# Altium PCB STM32_shield.PcbDoc
Units mm, origin at the board's own origin, x right, y up, seen from the top; angles counter-clockwise.
Board outline 157 x 97 mm, 2 copper layers (Top Layer, Bottom Layer), stack 1.571 mm thick; 43 components, 103 nets, 390 pads, 0 vias.
Unrouted connection lines stored in the file: 257.
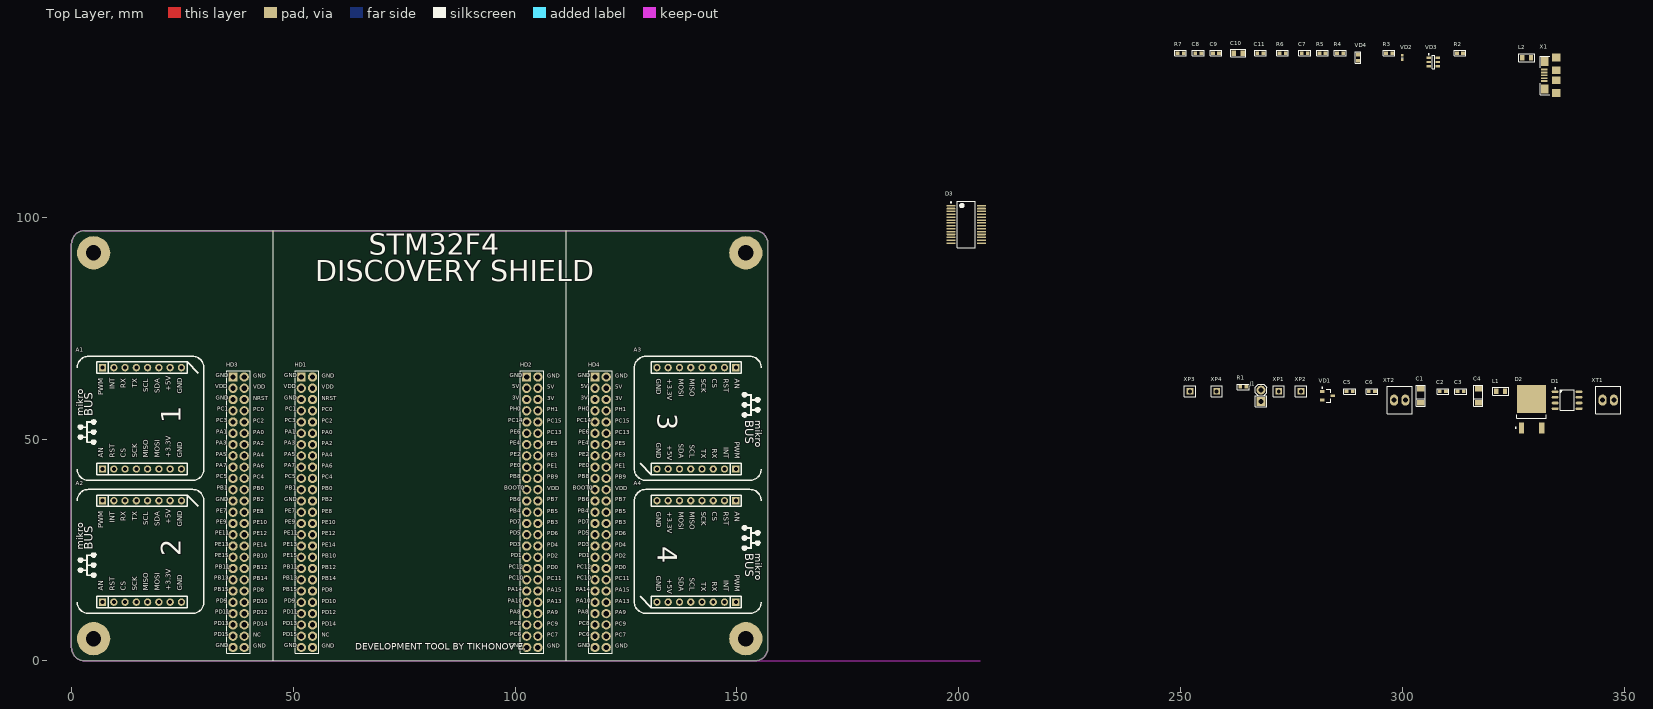
[diagram p0: Top Layer view]
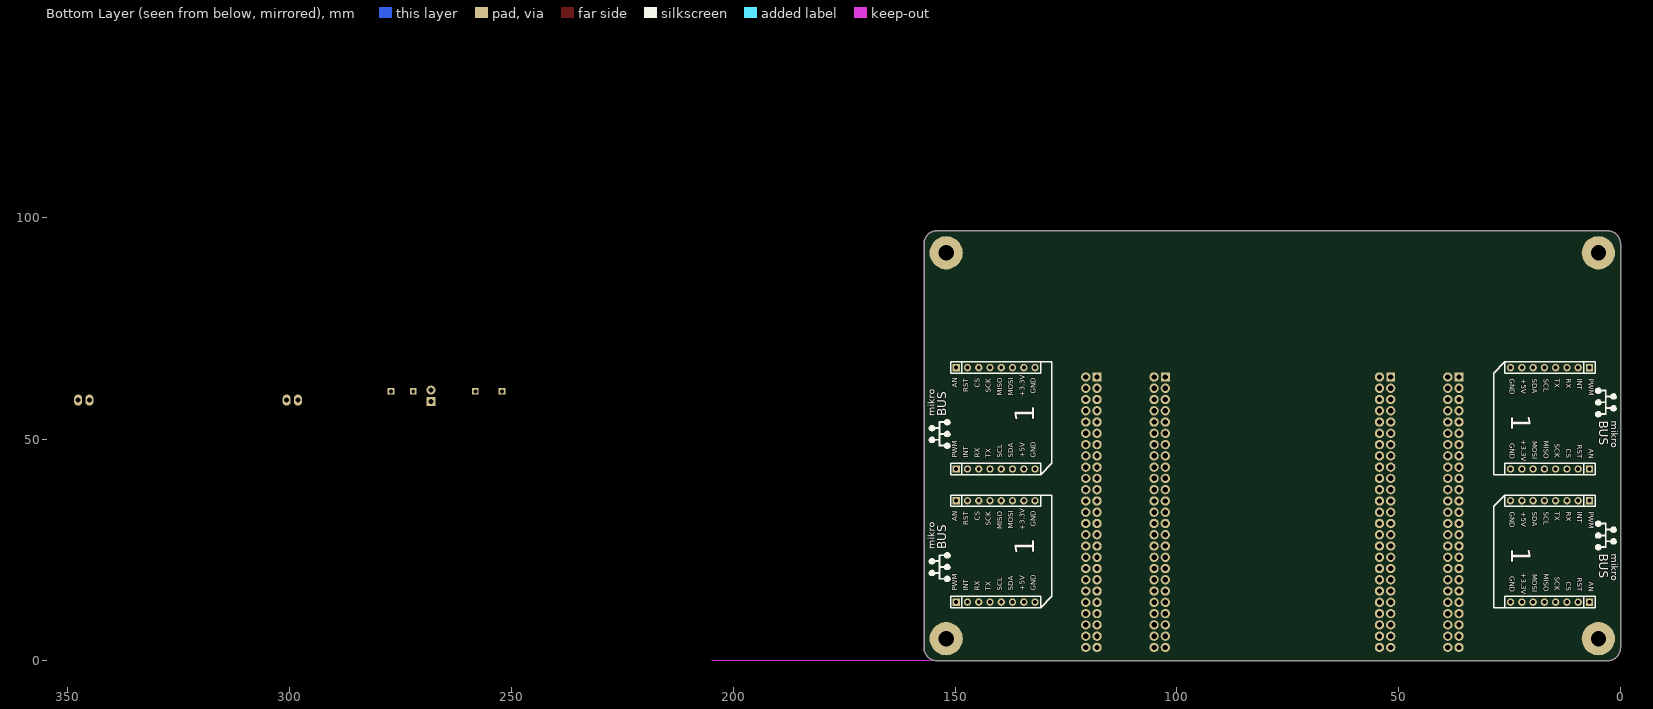
[diagram p1: Bottom Layer view, seen from below]

## Layer stack, top to bottom
Top Solder: solder mask 0.0102, Solder Resist, Dk 3.5
Top Layer: signal copper 0.0356
Dielectric 1: dielectric 1.5, FR-4, Dk 4.8
Bottom Layer: signal copper 0.0356
Bottom Solder: solder mask 0.0102, Solder Resist, Dk 3.5

## Board outline
0,3 0,94 cw(c3,94) 3,97 154,97 cw(c154,94) 157,94 157,3 cw(c154,3) 154,0 3,0 cw(c3,3)

## Design rules (kind name [scope] priority, off if disabled: settings)
Clearance Clearance_NPTH [All vs InPadClass('NPTH')] p1: gap=0.3 ignorepadtopadclearanceinfootprint=FALSE except(0: Arc-Hole Track-Hole SMDPad-Hole THPad-Hole Via-Hole Fill-Hole Poly-Hole Region-Hole Text-Hole)
Clearance Clearance_MultiLayerPad [OnLayer('Multi-Layer') and IsPad] p2: gap=0.25 ignorepadtopadclearanceinfootprint=FALSE except(0: Arc-Hole Track-Hole SMDPad-Hole THPad-Hole Via-Hole Fill-Hole Poly-Hole Region-Hole Text-Hole)
Clearance Clearance_Polygon [InPolygon] p3: gap=0.35 ignorepadtopadclearanceinfootprint=FALSE except(0: Arc-Hole Track-Hole SMDPad-Hole THPad-Hole Via-Hole Fill-Hole Poly-Hole Region-Hole Text-Hole)
Clearance [All] p4: gap=0.2 ignorepadtopadclearanceinfootprint=FALSE except(0: Arc-Hole Track-Hole SMDPad-Hole THPad-Hole Via-Hole Fill-Hole Poly-Hole Region-Hole Text-Hole)
DiffPairsRouting [All] p1: maxlimit=0.254 minlimit=0.15 mostfreqgap=0.254 toplayer_minwidth=0.15 toplayer_maxwidth=0.381 toplayer_prefwidth=0.381 bottomlayer_minwidth=0.15 bottomlayer_maxwidth=0.381 bottomlayer_prefwidth=0.381 maxuncoupledlength=12.7
Height [All] p1: minheight=0 maxheight=60 prefheight=12.7
HoleSize [All] p1: absolutevalues=TRUE maxlimit=5 minlimit=0.3 maxpercent=80.000 minpercent=20.000
HoleToHoleClearance [All] p1: gap=0.2 allowstackedmicrovias=TRUE
MinimumAnnularRing MinimumAnnularRing_1 [All] p1: minimumring=0.2
MinimumSolderMaskSliver [All] p1: minsoldermaskwidth=0.15
PlaneClearance [All] p1: clearance=0.5
PlaneConnect [All] p1: planeconnectstyle=Relief reliefexpansion=0.5 reliefentries=4 reliefconductorwidth=0.3 reliefairgap=0.2
PolygonConnect PolygonConnect_PowerPAD [All vs InPadClass('PowerPAD')] p1: connectstyle=Direct reliefconductorwidth=1 reliefentries=4 polygonreliefangle="90 Angle" airgapwidth=0.3
PolygonConnect PolygonConnect_PadGND [InNet('GND') and IsPad] p2: connectstyle=Relief reliefconductorwidth=0.4 reliefentries=4 polygonreliefangle="90 Angle" airgapwidth=0.2
PolygonConnect PolygonConnect_PadGND2 [InNet('GND2') and IsPad] p3: connectstyle=Relief reliefconductorwidth=0.4 reliefentries=4 polygonreliefangle="90 Angle" airgapwidth=0.2
PolygonConnect PolygonConnect_Via [IsVia] p4: connectstyle=Direct reliefconductorwidth=0.254 reliefentries=4 polygonreliefangle="90 Angle" airgapwidth=0.254
PolygonConnect [All] p5: connectstyle=Relief reliefconductorwidth=0.6 reliefentries=4 polygonreliefangle="90 Angle" airgapwidth=0.3
RoomDefinition Лист2 [InComponentClass('Лист2')] p1: confinementstyle=ConfineIn formatcopy=TRUE lockcomponents=FALSE outline 175,73 338,73 338,141 175,141
RoomDefinition Лист1 [InComponentClass('Лист1')] p2: confinementstyle=ConfineIn formatcopy=TRUE lockcomponents=FALSE outline 177.14,-2.22 350.14,-2.22 350.14,65.78 177.14,65.78
RoutingVias [All] p1: holewidth=0.3 width=0.7 viastyle="Through Hole" minholewidth=0.3 minwidth=0.7 maxholewidth=0.5 maxwidth=1.2
SilkToSilkClearance [All] p1: silktosilkclearance=0
SilkToSolderMaskClearance [IsPad] p1: minsilkscreentomaskgap=0.05 clearancetoexposedcopper=TRUE
SolderMaskExpansion [All] p1: expansion=0.05
Width [All] p1: maxlimit=10 minlimit=0.2 preferedwidth=0.6
21 further rules are at their usual default settings.

## Classes and differential pairs
component class Лист2: A3 A4 C7 C8 C9 C10 C11 D3 HD2 HD4 L2 R2 R3 R4 R5 R6 R7 VD2 VD3 VD4 X1
component class Лист1: A1 A2 C1 C2 C3 C4 C5 C6 D1 D2 HD1 HD3 J1 L1 R1 VD1 XP1 XP2 XP3 XP4 XT1 XT2
differential pair FTDI-D: +FTDI-D_P -FTDI-D_N
differential pair CAN: +CAN_P -CAN_N

## Components (designator, comment, footprint, x,y, rotation, side; value= is the part's Value field where it differs from the comment)
A1 "MIKROBUS HOST CONN._1" "MIKROBUS HOST CONN." 7,43.25 r90 top locked
A2 "MIKROBUS HOST CONN._1" "MIKROBUS HOST CONN." 7,13.25 r90 top locked
A3 "MIKROBUS HOST CONN._1" "MIKROBUS HOST CONN." 149.75,66.11 r270 top locked
A4 "MIKROBUS HOST CONN._1" "MIKROBUS HOST CONN." 149.75,36.11 r270 top locked
C1 "Tantalum capacitor, 10μF, 16V, ±10%, 1.2Ohm, case B (3528), -55...+125°C" "CAP: TANTAL-A" 304.14,59.78 r90 top value=10?F
C2 "Ceramic capacitor, 0.1uF, X7R, ±10%, 50V, 0603, -55...+125°C" "CAP: 0603" 309.14,60.78 r0 top value=0.1uF
C3 "Ceramic capacitor, 0.1uF, X7R, ±10%, 50V, 0603, -55...+125°C" "CAP: 0603" 313.14,60.78 r0 top value=0.1uF
C4 "Tantalum capacitor, 10μF, 16V, ±10%, 1.2Ohm, case B (3528), -55...+125°C" "CAP: TANTAL-A" 317.14,59.78 r90 top value=10?F
C5 "Ceramic capacitor, 0.1uF, X7R, ±10%, 50V, 0603, -55...+125°C" "CAP: 0603" 288.14,60.78 r0 top value=0.1uF
C6 "Ceramic capacitor, 0.1uF, X7R, ±10%, 50V, 0603, -55...+125°C" "CAP: 0603" 293.14,60.78 r0 top value=0.1uF
C7 "Ceramic capacitor, 0.1uF, X7R, ±10%, 50V, 0603, -55...+125°C" "CAP: 0603" 278,137 r0 top value=0.1uF
C8 "Ceramic capacitor, 0.1uF, X7R, ±10%, 50V, 0603, -55...+125°C" "CAP: 0603" 254,137 r0 top value=0.1uF
C9 "Ceramic capacitor, 0.1uF, X7R, ±10%, 50V, 0603, -55...+125°C" "CAP: 0603" 258,137 r0 top value=0.1uF
C10 "Ceramic capacitor, 10uF, X5R, ±10%, 10V, 0805, -55...+125°C" "CAP: 0805" 263,137 r0 top value=10uF
C11 "Ceramic capacitor, 0.1uF, X7R, ±10%, 50V, 0603, -55...+125°C" "CAP: 0603" 268,137 r0 top value=0.1uF
D1 "IC CAN transceiver, 5Mbps, TypeDuplex, 5V, -40...+85°C, SO8" 8-SOIC 337.14,58.78 r0 top
D2 "Linear voltage regulator, input 4.3...8.8V, 0.4V, output 3.3V, 0.8A, -40...+85°C, DPAK(TO-252)" DPAK(LDO) 329.14,55.78 r90 top
D3 "FT232RL" SSOP-28_N 201.7,98.4 r0 top
HD1 "PBD-50" "CON: PBD-50" 51.8,64 r0 top locked
HD2 "PBD-50" "CON: PBD-50" 102.6,64 r0 top locked
HD3 "PBD-50-1" "CON: PBD-50_NOT3D" 36.4,64 r0 top locked
HD4 "PBD-50-1" "CON: PBD-50_NOT3D" 118,64 r0 top locked
J1 "PLS-2" "CON: PLS-2" 268.14,59.78 r90 top
L1 "BLM21PG331SN1D" "IND: 0805" 322.14,60.78 r0 top value=330Ohm@100Mhz
L2 "BLM21PG331SN1D" "IND: 0805" 328,136 r0 top value=330Ohm@100Mhz
R1 "Resistor film, 100R, ±1%, 0603, 0.1W, -55...+125°C" "RES: 0603" 264.14,61.78 r0 top value=100R
R2 "Resistor film, 0R, ±1%, 0603, 0.1W, -55...+125°C" "RES: 0603" 313,137 r0 top value=0R
R3 "Resistor film, 330, ±1%, 0603, 0.1W, -55...+125°C" "RES: 0603" 297,137 r0 top value=330
R4 "Resistor film, 330, ±1%, 0603, 0.1W, -55...+125°C" "RES: 0603" 286,137 r0 top value=330
R5 "Resistor film, 10k, ±1%, 0603, 0.1W, -55...+125°C" "RES: 0603" 282,137 r0 top value=10k
R6 "Resistor film, 10k, ±1%, 0603, 0.1W, -55...+125°C" "RES: 0603" 273,137 r0 top value=10k
R7 "Resistor film, 10k, ±1%, 0603, 0.1W, -55...+125°C" "RES: 0603" 250,137 r0 top value=10k
VD1 "ESD Suppressors, Voltage, Current, VoltageDrop, RecoveryTime, SOT-23-3, -65...+150°C" SOT23 283.14,59.78 r0 top
VD2 "LED, *, *, *, -55...+150°C" "LED: 0402B" 300,136 r90 top
VD3 "USB ESD protection, 5V, Current, VoltageDrop, RecoveryTime, SOT23-6L, -55...+150°C" SOT23-6 307,135 r0 top
VD4 "LED, *, *, 0603, -55...+150°C" "LED: 0603R" 290,136 r90 top
X1 "USB micro B" "CON: USB micro-A (ZX62-B-5PA)" 332,132 r90 top
XP1 "\"GND\"" "CON: PLS-1" 272.14,60.78 r0 top
XP2 "\"GND\"" "CON: PLS-1" 277.14,60.78 r0 top
XP3 "\"GND\"" "CON: PLS-1" 252.14,60.78 r0 top
XP4 "\"GND\"" "CON: PLS-1" 258.14,60.78 r0 top
XT1 "Клеммник винтовой, 2pin, 2.54m, 250В, 8A" "CON: MPT 0,5/ 2-2,54 (Phoenix)" 345.14,58.78 r0 top
XT2 "Клеммник винтовой, 2pin, 2.54m, 250В, 8A" "CON: MPT 0,5/ 2-2,54 (Phoenix)" 298.14,58.78 r0 top

## Footprints (in the part's own frame and the unit in brackets; to place one, negate y for a bottom-side part, rotate by r counter-clockwise, add the part's x,y. Pads: shape width x height; smd on the part's side, far side on the other; paste and mask are expansions set on the pad)
8-SOIC [mm] "pitch 1.27 mm"
  rrect100% 1.55x0.6 smd: 1(-2.7,1.905) 2(-2.7,0.635) 3(-2.7,-0.635) 4(-2.7,-1.905) 5(2.7,-1.905) 6(2.7,-0.635) 7(2.7,0.635) 8(2.7,1.905)
  round 0.7 on Mech1: 28(-2.395,1.8)
  silkscreen extent -2.82,-2.3 1.61,2.82, body extent -3,-2.45 3,2.45, height 1.75
"CAP: 0603" [mm]
  rect 0.85x0.85 smd: 1(-0.7,0) 2(0.7,0)
  silkscreen extent -1.33,-0.63 1.33,0.63, body extent -0.8,-0.4 0.8,0.4, height 0.3
"CAP: 0805" [mm]
  rect 1x1.25 smd: 1(-1,0) 2(1,0)
  silkscreen extent -1.7,-0.82 1.7,0.82, body extent -1,-0.62 1,0.63, height 0.78
"CAP: TANTAL-A" [mm]
  rect 1.2x1.6 smd: 1(-1.6,0) 2(1.6,0)
  silkscreen extent -2.4,-1 2.4,1, body extent -1.7,-0.84 1.7,0.84, height 1.71
"CON: MPT 0,5/ 2-2,54 (Phoenix)" [mm] "1725656; 2.54; 2pin"
  oval 1.8x2.5 hole 1.1: 1(0,0) 2(2.54,0)
  round 0.5 on Bottom Overlay: ""(-2.2,0)
  round 0.5 on Mech1: ""(-2.2,0.018)
  silkscreen extent -1.5,-3.1 4.04,3.1, body extent -1.47,-3.13 4.07,3.07, height 8.5
"CON: PBD-50" [mm]
  rect 2x2 hole 1.2: 1(0,0)
  round 2.1 hole 1.2: 2(2.54,0) 3(0,-2.54) 4(2.54,-2.54) 5(0,-5.08) 6(2.54,-5.08) 7(0,-7.62) 8(2.54,-7.62) 9(0,-10.16) 10(2.54,-10.16) 11(0,-12.7) 12(2.54,-12.7) 13(0,-15.24) 14(2.54,-15.24) 15(0,-17.78) 16(2.54,-17.78) 17(0,-20.32) 18(2.54,-20.32) 19(0,-22.86) 20(2.54,-22.86) 21(0,-25.4) 22(2.54,-25.4) 23(0,-27.94) 24(2.54,-27.94) 25(0,-30.48) 26(2.54,-30.48) 27(0,-33.02) 28(2.54,-33.02) 29(0,-35.56) 30(2.54,-35.56) 31(0,-38.1) 32(2.54,-38.1) 33(0,-40.64) 34(2.54,-40.64) 35(0,-43.18) 36(2.54,-43.18) 37(0,-45.72) 38(2.54,-45.72) 39(0,-48.26) 40(2.54,-48.26) 41(0,-50.8) 42(2.54,-50.8) 43(0,-53.34) 44(2.54,-53.34) 45(0,-55.88) 46(2.54,-55.88) 47(0,-58.42) 48(2.54,-58.42) 49(0,-60.96) 50(2.54,-60.96)
  silkscreen extent -1.4,-62.3 3.9,1.4, body extent -1.27,-49.53 3.81,1.27, height 8.4
"CON: PBD-50_NOT3D" [mm] "посадочное место без 3D"
  rect 2x2 hole 1.2: 1(0,0)
  round 2.1 hole 1.2: 2(2.54,0) 3(0,-2.54) 4(2.54,-2.54) 5(0,-5.08) 6(2.54,-5.08) 7(0,-7.62) 8(2.54,-7.62) 9(0,-10.16) 10(2.54,-10.16) 11(0,-12.7) 12(2.54,-12.7) 13(0,-15.24) 14(2.54,-15.24) 15(0,-17.78) 16(2.54,-17.78) 17(0,-20.32) 18(2.54,-20.32) 19(0,-22.86) 20(2.54,-22.86) 21(0,-25.4) 22(2.54,-25.4) 23(0,-27.94) 24(2.54,-27.94) 25(0,-30.48) 26(2.54,-30.48) 27(0,-33.02) 28(2.54,-33.02) 29(0,-35.56) 30(2.54,-35.56) 31(0,-38.1) 32(2.54,-38.1) 33(0,-40.64) 34(2.54,-40.64) 35(0,-43.18) 36(2.54,-43.18) 37(0,-45.72) 38(2.54,-45.72) 39(0,-48.26) 40(2.54,-48.26) 41(0,-50.8) 42(2.54,-50.8) 43(0,-53.34) 44(2.54,-53.34) 45(0,-55.88) 46(2.54,-55.88) 47(0,-58.42) 48(2.54,-58.42) 49(0,-60.96) 50(2.54,-60.96)
  silkscreen extent -1.4,-62.3 3.9,1.4
"CON: PLS-1" [mm] "Connector; Header; 1 Position"
  rect 1.5x1.5 hole 0.9: 1(0,0)
  silkscreen extent -1.27,-1.27 1.27,1.27, body extent -1.27,-1.27 1.27,1.27, height 8.44
"CON: PLS-2" [mm]
  rect 2x2 hole 1.1: 1(-1.27,0)
  round 2 hole 1.1: 2(1.27,0)
  silkscreen extent -2.54,-1.27 2.54,1.27, body extent -2.57,-1.28 2.51,1.26, height 8.54
"CON: USB micro-A (ZX62-B-5PA)" [mm]
  rect 1.8x1.9 smd: 0(-4,-2.65) 0(4,-2.65)
  rect 2.1x1.6 smd: 0(-3.1,-0.1) 0(3.1,-0.1)
  rect 1.75x1.9 smd: 0(-1.125,-2.65) 0(1.125,-2.65)
  rect 0.4x1.4 smd: 1(-1.3,0) 2(-0.65,0) 3(0,0) 4(0.65,0) 5(1.3,0)
  round 0.5 on Top Overlay: ""(-4.85,0.75)
  silkscreen extent -4.35,-1.25 4.35,0.9, body extent -3.9,-4.8 3.9,0.2, height 2.68
DPAK(LDO) [mm] "DPAK for LDO"
  rect 2.5x1.2 smd: 1(-3.25,2.29) 3(-3.25,-2.29)
  rect 6.25x6.5 smd: TAB(3.25,0)
  round 0.5 on Mech1: ""(-3.2,2.9)
  silkscreen extent -3.37,-3.3 -0.3,3.71, body extent -3.8,-3.32 6.3,3.42, height 2.37
"IND: 0805" [mm]
  rect 1x1.25 smd: 1(-1,0) 2(1,0)
  silkscreen extent -1.8,-0.9 1.8,0.9, body extent -1,-0.62 1,0.63, height 0.85
"LED: 0402B" [mm]
  rect 0.6x0.6 smd: 1(-0.5,0) 2(0.5,0)
  silkscreen extent 0,-0.2 0,0.2, body extent -0.5,-0.25 0.51,0.25, height 0.45
"LED: 0603R" [mm]
  rect 0.85x0.85 smd: 1(-0.7,0) 2(0.7,0)
  silkscreen extent -1.33,-0.63 1.33,0.63, body extent -0.8,-0.4 0.8,0.4, height 0.6
"MIKROBUS HOST CONN." [mil]
  rect 65x65 hole 35: 1(0,0) 16(900,0)
  round 65 hole 35: 2(0,-100) 3(0,-200) 4(0,-300) 5(0,-400) 6(0,-500) 7(0,-600) 8(0,-700) 9(900,-700) 10(900,-600) 11(900,-500) 12(900,-400) 13(900,-300) 14(900,-200) 15(900,-100)
  silkscreen extent -100,-900 1000,225, body extent -49,-755 949,55, height 335
"RES: 0603" [mm]
  rect 0.85x0.85 smd: 1(-0.7,0) 2(0.7,0)
  silkscreen extent -1.33,-0.63 1.33,0.63, body extent -0.8,-0.4 0.8,0.4, height 0.44
SOT23 [mm]
  rect 1x0.6 smd: 1(-1.2,0.95) 2(-1.2,-0.95) 3(1.2,0)
  round 0.5 on Mech1: ""(-0.9,1.1)
  silkscreen extent -1.32,-1.5 0.7,1.92, body extent -1.32,-1.52 1.32,1.52, height 1.12
SOT23-6 [mm] "pitch 0.95 mm"
  rect 1x0.55 smd: 1(-1.025,0.95) 2(-1.025,0) 3(-1.025,-0.95) 4(1.025,-0.95) 5(1.025,0) 6(1.025,0.95)
  round 0.5 on Mech1: ""(-0.8,1)
  silkscreen extent -1.15,-1.5 0.25,1.9, body extent -1.4,-1.45 1.4,1.45, height 1.45
SSOP-28_N [mm] "SOP, 28-Leads, Body 10.2x5.3mm, Pitch 0.65mm, IPC Medium Density"
  oval 2.1x0.35 smd: 1(-3.45,4.225) 2(-3.45,3.575) 3(-3.45,2.925) 4(-3.45,2.275) 5(-3.45,1.625) 6(-3.45,0.975) 7(-3.45,0.325) 8(-3.45,-0.325) 9(-3.45,-0.975) 10(-3.45,-1.625) 11(-3.45,-2.275) 12(-3.45,-2.925) 13(-3.45,-3.575) 14(-3.45,-4.225) 15(3.45,-4.225) 16(3.45,-3.575) 17(3.45,-2.925) 18(3.45,-2.275) 19(3.45,-1.625) 20(3.45,-0.975) 21(3.45,-0.325) 22(3.45,0.325) 23(3.45,0.975) 24(3.45,1.625) 25(3.45,2.275) 26(3.45,2.925) 27(3.45,3.575) 28(3.45,4.225)
  silkscreen extent -3.57,-5.25 2,5.25, body extent -2.8,-5.25 2.8,5.25, height 2

## Part data
A1 A2 A3 A4: "mikroBUS Host Socket", Manufacturer=Connfly, PartNumber="PBS-8 (2pcs)", HelpURL=https://www.electronshik.ru/item/CONNFLY/PBS-8, SMD=No
  A1: Number=1
  A2: Number=2
  A3: Number=3
  A4: Number=4
C1 C4: library part Tantal_B, Manufacturer=AVX, Package="case B (3528)", PartNumber=TAJB106K016RNJ, Temperature=-55...+125°C, Tolerance=±10%, TypeCapacitor="Tantalum capacitor", TypeDielectric=X7R, ValueManufacturerPartNumber="Tantalum capacitor, 10?F, 16V, ±10%, 1.2Ohm, case B (3528), -55...+125°C", Voltage=16V, HelpURL=https://www.electronshik.ru/item/AVX/TAJB106K016RNJ, Impedance=1.2Ohm
C2 C3 C5 C6 C7 C8 C9 C11: library part Ceramic_0603, Manufacturer=SAMSUNG, Package=0603, PartNumber=CL10B104KB8NNNC, Temperature=-55...+125°C, Tolerance=±10%, TypeCapacitor="Ceramic capacitor", TypeDielectric=X7R, Voltage=50V, HelpURL=https://www.electronshik.ru/item/SAMSUNG/CL10B104KB8NNNC, ValueManufacturerPartNumber="Ceramic capacitor, 0.1uF, X7R, ±10%, 50V, 0603, -55...+125°C"
C10: library part Ceramic_0805, Manufacturer=SAMSUNG, Package=0805, PartNumber=CL21A106KPFNNNE, Temperature=-55...+125°C, Tolerance=±10%, TypeCapacitor="Ceramic capacitor", TypeDielectric=X5R, Voltage=10V, HelpURL=https://www.electronshik.ru/item/SAMSUNG/CL21A106KPFNNNE, ValueManufacturerPartNumber="Ceramic capacitor, 10uF, X5R, ±10%, 10V, 0805, -55...+125°C"
D1: library part TJA1042T/3, "CAN", Manufacturer=NXP, Package=SO8, Temperature=-40...+85°C, ComponentType="IC CAN transceiver", DataRate=5Mbps, HelpURL=https://www.electronshik.ru/item/NXP/TJA1042T%3A%3A3.118, PartNumber=TJA1042T/3, Supply=5V, ValueManufacturerPartNumber="IC CAN transceiver, 5Mbps, TypeDuplex, 5V, -40...+85°C, SO8"
D2: library part LD29080DT33R, "Linear voltage regulator", CurrentOutput=0.8A, Manufacturer=STMicroelectronics, Package=DPAK(TO-252), PartNumber=LD29080DT33, Temperature=-40...+85°C, VoltageInput="input 4.3...8.8V", VoltageOutput="output 3.3V", ComponentType="Linear voltage regulator", HelpURL=https://www.electronshik.ru/item/ST/LD29080DT33R, MaxDropout=0.4V, ValueManufacturerPartNumber="Linear voltage regulator, input 4.3...8.8V, 0.4V, output 3.3V, 0.8A, -40...+85°C, DPAK(TO-252)"
D3: "USB UART Asynchronous Serial Data Transfer Chip, SSOP-28, Tape and Reel", Manufacturer=FTDI, Package=SSOP-28, ComponentType=UART-USB, HelpURL=https://www.electronshik.ru/item/FTDI/FT232RL, PartNumber=FT232RL, Supply=5V
HD1 HD2: "Розетка в 2 ряда", Manufacturer="Connfly Electronic", HelpURL=https://www.electronshik.ru/item/CONNFLY/PBD-50, Part_Number="PBD-50 (DS1023-2x25)", Pattern/Footprint=PBD-50, Published=2019, Publisher=TEN, Type=Розетка
HD3 HD4: "Пустое место", Manufacturer="Connfly Electronic", HelpURL=https://www.electronshik.ru/item/CONNFLY/PBD-50, Part_Number=PBD-50, Published=2019, Publisher=TEN, Type=Розетка
J1: library part Jumper_single, CommentText="\"120\"", PartNumber=PLS-2
L1 L2: library part EMI_SMD, Manufacturer="Murata Electronics", MaxCurrent=1500mA, Package=0805, Temperature=-55...+125°C, TypeInductor="Fixed inductor", ValueManufacturerPartNumber="Fixed inductor, 330Ohm@100Mhz, Tolerance, 0805, 1500mA, -55...+125°C", HelpURL=https://www.electronshik.ru/item/MUR/BLM21PG331SN1D, PartNumber=BLM21PG331SN1D
R1: library part Resistor_0603, Manufacturer=Yageo, Package=0603, PartNumber=RC0603FR-07100RL, Power=0.1W, Temperature=-55...+125°C, Tolerance=±1%, TypeResistor="Resistor film", HelpURL=https://www.electronshik.ru/item/YAG/RC0603FR-07100RL, ValueManufacturerPartNumber="Resistor film, 100R, ±1%, 0603, 0.1W, -55...+125°C"
R2: library part Resistor_0603, Manufacturer=Yageo, Package=0603, PartNumber=RC0603JR-070RL, Power=0.1W, Temperature=-55...+125°C, Tolerance=±1%, TypeResistor="Resistor film", HelpURL=https://www.electronshik.ru/item/YAG/RC0603JR-070RL, ValueManufacturerPartNumber="Resistor film, 0R, ±1%, 0603, 0.1W, -55...+125°C"
R3 R4: library part Resistor_0603, Manufacturer=Yageo, Package=0603, PartNumber=RC0603JR-07330RL, Power=0.1W, Temperature=-55...+125°C, Tolerance=±1%, TypeResistor="Resistor film", HelpURL=https://www.electronshik.ru/item/YAG/RC0603JR-074K7L, ValueManufacturerPartNumber="Resistor film, 330, ±1%, 0603, 0.1W, -55...+125°C"
R5 R6 R7: library part Resistor_0603, Manufacturer=Yageo, Package=0603, PartNumber=RC0603JR-0710KL, Power=0.1W, Temperature=-55...+125°C, Tolerance=±1%, TypeResistor="Resistor film", HelpURL=https://www.electronshik.ru/item/YAG/RC0603JR-0710KL, ValueManufacturerPartNumber="Resistor film, 10k, ±1%, 0603, 0.1W, -55...+125°C"
VD1: library part PESD2CAN, Breakdown Voltage=28V, Manufacturer=NEXPERIA, Package=SOT-23-3, PartNumber=PESD2CAN.215, Temperature=-65...+150°C, HelpURL=https://www.electronshik.ru/item/NEX-NXP/PESD2CAN.215, TypeDiode="ESD Suppressors", ValueManufacturerPartNumber="ESD Suppressors, Voltage, Current, VoltageDrop, RecoveryTime, SOT-23-3, -65...+150°C"
VD2: library part LED_single, Color=GREEN, Manufacturer=Foryard, PartNumber=FYLS-0603UGC, Temperature=-55...+150°C, HelpURL=https://www.electronshik.ru/item/FORYARD/FYLS-0603UGC, TypeDiode=LED, ValueManufacturerPartNumber="LED, *, *, *, -55...+150°C"
VD3: library part USBLC6-4SC6, Manufacturer="ST Microelectronics", Package=SOT23-6L, Temperature=-55...+150°C, Voltage=5V, HelpURL=https://www.electronshik.ru/item/ST/USBLC6-2SC6, PartNumber=USBLC6-4SC6, TypeDiode="USB ESD protection", ValueManufacturerPartNumber="USB ESD protection, 5V, Current, VoltageDrop, RecoveryTime, SOT23-6L, -55...+150°C"
VD4: library part LED_single, Color=RED, Manufacturer=Foryard, Package=0603, PartNumber="FYLS-0603URC / Foryard", Temperature=-55...+150°C, HelpURL=https://www.electronshik.ru/item/FORYARD/FYLS-0603URC, TypeDiode=LED, ValueManufacturerPartNumber="LED, *, *, 0603, -55...+150°C"
X1: library part Connector_USB_micro_B, Manufacturer="Hirose Electric", PartNumber=ZX62-B-5PA, CommentText="\"USB\"", HelpURL=https://www.electronshik.ru/item/HI/ZX62-B-5PA%5B33%5D, TypeConnector="USB micro B", ValueManufacturerPartNumber="USB micro B"
XP1 XP2 XP3 XP4: library part PLS-1, "Вилка", Manufacturer="Ningbo connfly electronic (Zhenqin)", HelpURL="\\Datasrv\дивизион эп\works\Департамент разработки\оСиСР\КОМПЛЕКТАЦИЯ\разъемы\pls.pdf", Part_Number=PLS-1, Published=26.12.2017, Publisher=TEN, Type="Control pin"
XT1 XT2: library part Connector_terminal_2pin, CurrentMax=8A, Manufacturer=Китай, PartNumber=308-021-14, VoltageMax=250В, CommentText="\"Разъем\"", HelpURL=https://www.chipdip.ru/product/dg350-3.5-02p-12, HelpURL2=https://www.electronshik.ru/item/DEGSON/DG308-2.54-02P-14-00A%5BH%5D, Multichannel=2pin, Pitch=2.54m, TypeConnector="Клеммник винтовой", ValueManufacturerPartNumber="Клеммник винтовой, 2pin, 2.54m, 250В, 8A"

## Free pads (board coordinates)
  round 7.5 hole 3.4: ""(5,5) ""(5,92) ""(152,5) ""(152,92)

## Nets (pads, with @x,y where several pads share a name; then routed paths per layer and width w, separated by ;. In a path a pad name is that pad's centre, name@x,y a point inside that pad or via, vN(x,y) a via of type N, cw(c..) or ccw(c..) an arc to the next point about the centre after c; other vN are vias at no path point)
3V: C11.2 D3.4 HD2.5 HD2.6 HD3.3 HD3.4 HD4.3 HD4.4 HD4.5 HD4.6
5V: A1.10 A2.10 A3.10 A4.10 C5.2 C9.2 C10.2 D1.3 D3.20 HD2.3 HD2.4 L1.2
BOOT0: HD2.21 HD4.21
CAN_N: D1.6 J1.1 VD1.2 XT2.1
CAN_P: D1.7 R1.2 VD1.1 XT1.2
FTDI-D_N: D3.16 VD3.1 X1.2
FTDI-D_P: D3.15 VD3.6 X1.3
GND: A1.8 A1.9 A2.8 A2.9 A3.8 A3.9 A4.8 A4.9 C1.1 C2.1 C3.1 C4.1 C5.1 C6.1 C7.1 C8.1 C9.1 C10.1 C11.1 D1.2 D1.8 D2.TAB D3.7 D3.18 D3.21 D3.25 D3.26 HD1.1 HD1.2 HD1.5 HD1.23 HD1.49 HD1.50 HD2.1 HD2.2 HD2.49 HD2.50 HD3.1 HD3.2 HD3.5 HD3.23 HD3.49 HD3.50 HD4.1 HD4.2 HD4.49 HD4.50 R2.1 R7.1 VD1.3 VD3.2 X1.0 X1.5 XP1.1 XP2.1 XP3.1 XP4.1 XT2.2
NetA1_11: A1.11 A2.11 HD2.24 HD4.24
NetA1_12: A1.12 A2.12 HD2.19 HD4.19
NetA3_1: A3.1 HD1.19 HD3.19
NetA3_16: A3.16 HD1.21 HD3.21
NetA4_1: A4.1 HD1.22 HD3.22
NetC1_2: C1.2 C2.2 D2.1 L1.1
NetC8_2: C8.2 D3.17
NetD1_1: D1.1 HD2.33 HD4.33
NetD1_4: D1.4 HD2.36 HD4.36
NetD3_1: D3.1 HD1.13 HD3.13
NetD3_5: D3.5 HD1.14 HD3.14
NetD3_19: D3.19 R5.1 R6.2
NetJ1_2: J1.2 R1.1
NetL2_1: L2.1 X1.1
NetR2_2: R2.2 X1.4
NetR3_1: R3.1 VD2.1
NetR4_1: R4.1 VD4.1
NetR6_1: R6.1 R7.2
NRST: HD1.6 HD3.6
PA0: HD1.12 HD3.12
PA1/TIM-2/5: A1.16 HD1.11 HD3.11
PA4: HD1.16 HD3.16
PA5: HD1.15 HD3.15
PA6: HD1.18 HD3.18
PA7: HD1.17 HD3.17
PA8/I2C3-SCL: A3.12 A4.12 HD2.43 HD4.43
PA9: HD2.44 HD4.44
PA10: HD2.41 HD4.41
PA13: HD2.42 HD4.42
PA14: HD2.39 HD4.39
PA15: HD2.40 HD4.40
PB2: HD1.24 HD3.24
PB3/SPI13-SCK: A3.4 A4.4 HD2.28 HD4.28
PB4/SPI13-MISO: A3.5 A4.5 HD2.25 HD4.25
PB5/SPI13-MOSI: A3.6 A4.6 HD2.26 HD4.26
PB6: HD2.23 HD4.23
PB9: HD2.20 HD4.20
PB10/UART3-TX: A1.13 A2.13 HD1.34 HD3.34
PB11/UART3-RX: A1.14 A2.14 HD1.35 HD3.35
PB12/CS: A1.3 HD1.36 HD3.36
PB13/SPI2-SCK: A1.4 A2.4 HD1.37 HD3.37
PB14/SPI2-MISO: A1.5 A2.5 HD1.38 HD3.38
PB15/SPI2-MOSI: A1.6 A2.6 HD1.39 HD3.39
PC0: HD1.8 HD3.8
PC1/ADC123-IN11: A1.1 HD1.7 HD3.7
PC2/ADC123-IN12: A2.1 HD1.10 HD3.10
PC3: HD1.9 HD3.9
PC4: HD1.20 HD3.20
PC6/UART6-TX: A3.13 A4.13 HD2.47 HD4.47
PC7/UART6-RX: A3.14 A4.14 HD2.48 HD4.48
PC8/TIM-3/8: A4.16 HD2.45 HD4.45
PC9/I2C3-SDA: A3.11 A4.11 HD2.46 HD4.46
PC10: HD2.37 HD4.37
PC11/INT: A4.15 HD2.38 HD4.38
PC12: HD2.35 HD4.35
PC13: HD2.12 HD4.12
PC14: HD2.9 HD4.9
PC15: HD2.10 HD4.10
PD2/INT: A3.15 HD2.34 HD4.34
PD3: HD2.31 HD4.31
PD4: HD2.32 HD4.32
PD5: HD2.29 HD4.29
PD6/RST: A4.2 HD2.30 HD4.30
PD7/CS: A4.3 HD2.27 HD4.27
PD8: HD1.40 HD3.40
PD9: HD1.41 HD3.41
PD10: HD1.42 HD3.42
PD11: HD1.43 HD3.43
PD12: HD1.44 HD3.44
PD13: HD1.45 HD3.45
PD14: HD1.46 HD3.46
PD15: HD1.47 HD3.47
PE0: HD2.17 HD4.17
PE1: HD2.18 HD4.18
PE2: HD2.15 HD4.15
PE3: HD2.16 HD4.16
PE4/RST: A3.2 HD2.13 HD4.13
PE5/CS: A3.3 HD2.14 HD4.14
PE6: HD2.11 HD4.11
PE7/INT: A1.15 HD1.25 HD3.25
PE8/INT: A2.15 HD1.26 HD3.26
PE9: HD1.27 HD3.27
PE10/RST: A1.2 HD1.28 HD3.28
PE11: HD1.29 HD3.29
PE12/RST: A2.2 HD1.30 HD3.30
PE13/TIM-1: A2.16 HD1.31 HD3.31
PE14/CS: A2.3 HD1.32 HD3.32
PE15: HD1.33 HD3.33
PH0: HD2.7 HD4.7
PH1: HD2.8 HD4.8
RX-LED: D3.23 VD2.2
TX-LED: D3.22 VD4.2
VBUS: C7.2 L2.2 R5.2 VD3.5
VCC3.3: A1.7 A2.7 A3.7 A4.7 C3.2 C4.2 C6.2 D1.5 D2.3 R3.2 R4.2 XT1.1
VDD: HD1.3 HD1.4 HD2.22 HD4.22
pads on no net: D1.28 D2. D3.2 D3.3 D3.6 D3.8 D3.9 D3.10 D3.11 D3.12 D3.13 D3.14 D3.24 D3.27 D3.28 HD1.48 HD3.48 VD1. VD3. VD3.3 VD3.4 X1. XT1. XT2.

## Keep-outs
Keep-Out Layer:
  lines w0.2: 53.8,0 204.8,0 ; 0,94 cw(c3,94) 3,97 154,97 ; 0,94 0,94 ; 0,94 0,3 ccw(c3,3) 3,0 ; 3,0 3,0 ; 3,0 154,0 ccw(c154,3) 157,3 ; 154,97 cw(c154,94) 157,94 157,3 ; 154,97 154,97 ; 157,3 157,3

## Silkscreen, mask and mechanical layers (free items; w line width, h text height)
Top Overlay:
  lines w0.2: 45.5,0 45.5,97 ; 111.5,0 111.5,97
  text "STM32F4" at 67,90 h8
  text "DISCOVERY SHIELD" at 55,84 h8
  text "GND" at 32.521,63.6 h1.5
  text "GND" at 47.921,63.6 h1.5
  text "GND" at 98.764,63.6 h1.5
  text "GND" at 114.164,63.6 h1.5
  text "GND" at 41,63.5 h1.5
  text "GND" at 56.4,63.5 h1.5
  text "GND" at 107.199,63.5 h1.5
  text "GND" at 122.599,63.5 h1.5
  text "VDD" at 32.442,61.1 h1.5
  text "VDD" at 47.842,61.1 h1.5
  text "5V" at 99.394,61.1 h1.5
  text "5V" at 114.794,61.1 h1.5
  text "VDD" at 41,61 h1.5
  text "VDD" at 56.4,61 h1.5
  text "5V" at 107.199,61 h1.5
  text "5V" at 122.599,61 h1.5
  text "GND" at 32.521,58.5 h1.5
  text "GND" at 47.921,58.5 h1.5
  text "3V" at 99.393,58.5 h1.5
  text "3V" at 114.793,58.5 h1.5
  text "NRST" at 41,58.4 h1.5
  text "NRST" at 56.4,58.4 h1.5
  text "3V" at 107.199,58.4 h1.5
  text "3V" at 122.599,58.4 h1.5
  text "PC1" at 32.836,56 h1.5
  text "PC1" at 48.236,56 h1.5
  text "PH0" at 98.843,56 h1.5
  text "PH0" at 114.243,56 h1.5
  text "PC0" at 41,55.9 h1.5
  text "PC0" at 56.4,55.9 h1.5
  text "PH1" at 107.199,55.9 h1.5
  text "PH1" at 122.599,55.9 h1.5
  text "PC3" at 32.679,53.5 h1.5
  text "PC3" at 48.079,53.5 h1.5
  text "PC14" at 98.451,53.5 h1.5
  text "PC14" at 113.851,53.5 h1.5
  text "PC2" at 41,53.4 h1.5
  text "PC2" at 56.4,53.4 h1.5
  text "PC15" at 107.199,53.4 h1.5
  text "PC15" at 122.599,53.4 h1.5
  text "PA1" at 32.678,50.9 h1.5
  text "PA1" at 48.078,50.9 h1.5
  text "PE6" at 98.922,50.9 h1.5
  text "PE6" at 114.322,50.9 h1.5
  text "PA0" at 41,50.8 h1.5
  text "PA0" at 56.4,50.8 h1.5
  text "PC13" at 107.199,50.8 h1.5
  text "PC13" at 122.599,50.8 h1.5
  text "PA3" at 32.521,48.4 h1.5
  text "PA3" at 47.921,48.4 h1.5
  text "PE4" at 98.844,48.4 h1.5
  text "PE4" at 114.244,48.4 h1.5
  text "PA2" at 41,48.3 h1.5
  text "PA2" at 56.4,48.3 h1.5
  text "PE5" at 107.199,48.3 h1.5
  text "PE5" at 122.599,48.3 h1.5
  text "PA5" at 32.521,45.8 h1.5
  text "PA5" at 47.921,45.8 h1.5
  text "PE2" at 98.922,45.8 h1.5
  text "PE2" at 114.322,45.8 h1.5
  text "PA4" at 41,45.7 h1.5
  text "PA4" at 56.4,45.7 h1.5
  text "PE3" at 107.199,45.7 h1.5
  text "PE3" at 122.599,45.7 h1.5
  text "PA7" at 32.521,43.3 h1.5
  text "PA7" at 47.921,43.3 h1.5
  text "PE0" at 98.922,43.3 h1.5
  text "PE0" at 114.322,43.3 h1.5
  text "PA6" at 41,43.2 h1.5
  text "PA6" at 56.4,43.2 h1.5
  text "PE1" at 107.199,43.2 h1.5
  text "PE1" at 122.599,43.2 h1.5
  text "PC5" at 32.679,40.8 h1.5
  text "PC5" at 48.079,40.8 h1.5
  text "PB8" at 98.843,40.8 h1.5
  text "PB8" at 114.243,40.8 h1.5
  text "PC4" at 41,40.7 h1.5
  text "PC4" at 56.4,40.7 h1.5
  text "PB9" at 107.199,40.7 h1.5
  text "PB9" at 122.599,40.7 h1.5
  text "PB1" at 32.757,38.2 h1.5
  text "PB1" at 48.157,38.2 h1.5
  text "BOOT0" at 97.582,38.2 h1.5
  text "BOOT0" at 112.982,38.2 h1.5
  text "PB0" at 41,38.1 h1.5
  text "PB0" at 56.4,38.1 h1.5
  text "VDD" at 107.2,38.1 h1.5
  text "VDD" at 122.6,38.1 h1.5
  text "GND" at 32.521,35.7 h1.5
  text "GND" at 47.921,35.7 h1.5
  text "PB6" at 98.843,35.7 h1.5
  text "PB6" at 114.243,35.7 h1.5
  text "PB2" at 41,35.6 h1.5
  text "PB2" at 56.4,35.6 h1.5
  text "PB7" at 107.199,35.6 h1.5
  text "PB7" at 122.599,35.6 h1.5
  text "PE7" at 32.679,33.1 h1.5
  text "PE7" at 48.079,33.1 h1.5
  text "PB4" at 98.765,33.1 h1.5
  text "PB4" at 114.165,33.1 h1.5
  text "PE8" at 41,33 h1.5
  text "PE8" at 56.4,33 h1.5
  text "PB5" at 107.199,33 h1.5
  text "PB5" at 122.599,33 h1.5
  text "PE9" at 32.679,30.6 h1.5
  text "PE9" at 48.079,30.6 h1.5
  text "PD7" at 98.843,30.6 h1.5
  text "PD7" at 114.243,30.6 h1.5
  text "PE10" at 41,30.5 h1.5
  text "PE10" at 56.4,30.5 h1.5
  text "PB3" at 107.199,30.5 h1.5
  text "PB3" at 122.599,30.5 h1.5
  text "PE11" at 32.442,28.1 h1.5
  text "PE11" at 47.842,28.1 h1.5
  text "PD5" at 98.843,28.1 h1.5
  text "PD5" at 114.243,28.1 h1.5
  text "PE12" at 41,28 h1.5
  text "PE12" at 56.4,28 h1.5
  text "PD6" at 107.199,28 h1.5
  text "PD6" at 122.599,28 h1.5
  text "PE13" at 32.285,25.5 h1.5
  text "PE13" at 47.685,25.5 h1.5
  text "PD3" at 98.843,25.5 h1.5
  text "PD3" at 114.243,25.5 h1.5
  text "PE14" at 41,25.4 h1.5
  text "PE14" at 56.4,25.4 h1.5
  text "PD4" at 107.199,25.4 h1.5
  text "PD4" at 122.599,25.4 h1.5
  text "PE15" at 32.285,23 h1.5
  text "PE15" at 47.685,23 h1.5
  text "PD1" at 98.999,23 h1.5
  text "PD1" at 114.399,23 h1.5
  text "PB10" at 41,22.9 h1.5
  text "PB10" at 56.4,22.9 h1.5
  text "PD2" at 107.199,22.9 h1.5
  text "PD2" at 122.599,22.9 h1.5
  text "PB11" at 32.363,20.4 h1.5
  text "PB11" at 47.763,20.4 h1.5
  text "PC12" at 98.528,20.4 h1.5
  text "PC12" at 113.928,20.4 h1.5
  text "PB12" at 41,20.3 h1.5
  text "PB12" at 56.4,20.3 h1.5
  text "PD0" at 107.199,20.3 h1.5
  text "PD0" at 122.599,20.3 h1.5
  text "PB13" at 32.206,17.9 h1.5
  text "PB13" at 47.606,17.9 h1.5
  text "PC10" at 98.528,17.9 h1.5
  text "PC10" at 113.928,17.9 h1.5
  text "PB14" at 41,17.8 h1.5
  text "PB14" at 56.4,17.8 h1.5
  text "PC11" at 107.199,17.8 h1.5
  text "PC11" at 122.599,17.8 h1.5
  text "PB15" at 32.206,15.4 h1.5
  text "PB15" at 47.606,15.4 h1.5
  text "PA14" at 98.293,15.4 h1.5
  text "PA14" at 113.693,15.4 h1.5
  text "PD8" at 41,15.3 h1.5
  text "PD8" at 56.4,15.3 h1.5
  text "PA15" at 107.199,15.3 h1.5
  text "PA15" at 122.599,15.3 h1.5
  text "PD9" at 32.6,12.8 h1.5
  text "PD9" at 48,12.8 h1.5
  text "PA10" at 98.37,12.8 h1.5
  text "PA10" at 113.77,12.8 h1.5
  text "PD10" at 41,12.7 h1.5
  text "PD10" at 56.4,12.7 h1.5
  text "PA13" at 107.199,12.7 h1.5
  text "PA13" at 122.599,12.7 h1.5
  text "PD11" at 32.363,10.3 h1.5
  text "PD11" at 47.763,10.3 h1.5
  text "PA8" at 98.764,10.3 h1.5
  text "PA8" at 114.164,10.3 h1.5
  text "PD12" at 41,10.2 h1.5
  text "PD12" at 56.4,10.2 h1.5
  text "PA9" at 107.199,10.2 h1.5
  text "PA9" at 122.599,10.2 h1.5
  text "PD13" at 32.206,7.7 h1.5
  text "PD13" at 47.606,7.7 h1.5
  text "PC8" at 98.922,7.7 h1.5
  text "PC8" at 114.322,7.7 h1.5
  text "PD14" at 41,7.6 h1.5
  text "PD14" at 56.4,7.6 h1.5
  text "PC9" at 107.199,7.6 h1.5
  text "PC9" at 122.599,7.6 h1.5
  text "PD15" at 32.206,5.2 h1.5
  text "PD15" at 47.606,5.2 h1.5
  text "PC6" at 98.922,5.2 h1.5
  text "PC6" at 114.322,5.2 h1.5
  text "NC" at 41,5.1 h1.5
  text "NC" at 56.4,5.1 h1.5
  text "PC7" at 107.199,5.1 h1.5
  text "PC7" at 122.599,5.1 h1.5
  text "GND" at 32.521,2.7 h1.5
  text "GND" at 47.921,2.7 h1.5
  text "GND" at 98.764,2.7 h1.5
  text "GND" at 114.164,2.7 h1.5
  text "GND" at 41,2.6 h1.5
  text "GND" at 56.4,2.6 h1.5
  text "GND" at 107.199,2.6 h1.5
  text "GND" at 122.599,2.6 h1.5
  text "DEVELOPMENT TOOL BY TIKHONOV E." at 64,2 h2.5
Top Assy:
  lines w0.2: 78.5,0 78.5,97
Border:
  lines w0.2: 53.8,0 204.8,0 ; 0,94 cw(c3,94) 3,97 154,97 cw(c154,94) 157,94 157,3 cw(c154,3) 154,0 3,0 cw(c3,3) 0,3 0,94 ; 0,94 0,94

## Dimensions
0,97 to 157,97 on Size
0,0 to 0,97 on Size

## Text inside footprints (layer, text, board x,y; h text height)
A1: Top Overlay "1" at 26.05,53.537 h7.62 r90; Top Overlay "BUS" at 5.514,55.112 h3.2 r90; Top Overlay "mikro" at 3.176,55.112 h2.7 r90; Top Overlay "PWM" at 7.635,59.932 h2 r90; Top Overlay "AN" at 7.635,45.79 h2 r90; Top Overlay "+5V" at 22.875,60.801 h2 r90; Top Overlay "GND" at 25.415,60.217 h2 r90; Top Overlay "TX" at 15.255,61.593 h2 r90; Top Overlay "RX" at 12.715,61.504 h2 r90; Top Overlay "INT" at 10.175,61.195 h2 r90; Top Overlay "SCL" at 17.795,60.61 h2 r90; Top Overlay "GND" at 25.415,45.79 h2 r90; Top Overlay "+3.3V" at 22.875,45.79 h2 r90; Top Overlay "MOSI" at 20.335,45.79 h2 r90; Top Overlay "SCK" at 15.255,45.79 h2 r90; Top Overlay "MISO" at 17.795,45.79 h2 r90; Top Overlay "CS" at 12.715,45.79 h2 r90; Top Overlay "RST" at 10.175,45.79 h2 r90; Top Overlay "SDA" at 20.335,60.377 h2 r90; Bottom Overlay "1" at 26.05,55.569 h7.62 r90; Bottom Overlay "RST" at 10.175,48.774 h2 r90; Bottom Overlay "CS" at 12.715,47.797 h2 r90; Bottom Overlay "MISO" at 17.795,49.629 h2 r90; Bottom Overlay "SCK" at 15.255,48.945 h2 r90; Bottom Overlay "MOSI" at 20.335,49.556 h2 r90; Bottom Overlay "+3.3V" at 22.875,49.854 h2 r90; Bottom Overlay "GND" at 25.415,49.092 h2 r90; Bottom Overlay "AN" at 7.635,47.831 h2 r90; Bottom Overlay "SDA" at 20.335,63.57 h2 r90; Bottom Overlay "SCL" at 17.795,63.57 h2 r90; Bottom Overlay "INT" at 10.175,63.57 h2 r90; Bottom Overlay "RX" at 12.715,63.57 h2 r90; Bottom Overlay "TX" at 15.255,63.57 h2 r90; Bottom Overlay "GND" at 25.415,63.57 h2 r90; Bottom Overlay "+5V" at 22.875,63.57 h2 r90; Bottom Overlay "PWM" at 7.635,63.57 h2 r90; Bottom Overlay "BUS" at 5.476,54.172 h3.43 r90; Bottom Overlay "mikro" at 2.682,54.172 h2.7 r90
A2: Top Overlay "2" at 26.05,23.537 h7.62 r90; Top Overlay "BUS" at 5.514,25.112 h3.2 r90; Top Overlay "mikro" at 3.176,25.112 h2.7 r90; Top Overlay "PWM" at 7.635,29.932 h2 r90; Top Overlay "AN" at 7.635,15.79 h2 r90; Top Overlay "+5V" at 22.875,30.801 h2 r90; Top Overlay "GND" at 25.415,30.217 h2 r90; Top Overlay "TX" at 15.255,31.593 h2 r90; Top Overlay "RX" at 12.715,31.504 h2 r90; Top Overlay "INT" at 10.175,31.195 h2 r90; Top Overlay "SCL" at 17.795,30.61 h2 r90; Top Overlay "GND" at 25.415,15.79 h2 r90; Top Overlay "+3.3V" at 22.875,15.79 h2 r90; Top Overlay "MOSI" at 20.335,15.79 h2 r90; Top Overlay "SCK" at 15.255,15.79 h2 r90; Top Overlay "MISO" at 17.795,15.79 h2 r90; Top Overlay "CS" at 12.715,15.79 h2 r90; Top Overlay "RST" at 10.175,15.79 h2 r90; Top Overlay "SDA" at 20.335,30.377 h2 r90; Bottom Overlay "1" at 26.05,25.569 h7.62 r90; Bottom Overlay "RST" at 10.175,18.774 h2 r90; Bottom Overlay "CS" at 12.715,17.797 h2 r90; Bottom Overlay "MISO" at 17.795,19.629 h2 r90; Bottom Overlay "SCK" at 15.255,18.945 h2 r90; Bottom Overlay "MOSI" at 20.335,19.556 h2 r90; Bottom Overlay "+3.3V" at 22.875,19.854 h2 r90; Bottom Overlay "GND" at 25.415,19.092 h2 r90; Bottom Overlay "AN" at 7.635,17.831 h2 r90; Bottom Overlay "SDA" at 20.335,33.57 h2 r90; Bottom Overlay "SCL" at 17.795,33.57 h2 r90; Bottom Overlay "INT" at 10.175,33.57 h2 r90; Bottom Overlay "RX" at 12.715,33.57 h2 r90; Bottom Overlay "TX" at 15.255,33.57 h2 r90; Bottom Overlay "GND" at 25.415,33.57 h2 r90; Bottom Overlay "+5V" at 22.875,33.57 h2 r90; Bottom Overlay "PWM" at 7.635,33.57 h2 r90; Bottom Overlay "BUS" at 5.476,24.172 h3.43 r90; Bottom Overlay "mikro" at 2.682,24.172 h2.7 r90
A3: Top Overlay "3" at 130.7,55.823 h7.62 r270; Top Overlay "BUS" at 151.236,54.248 h3.2 r270; Top Overlay "mikro" at 153.574,54.248 h2.7 r270; Top Overlay "PWM" at 149.115,49.428 h2 r270; Top Overlay "AN" at 149.115,63.57 h2 r270; Top Overlay "+5V" at 133.875,48.559 h2 r270; Top Overlay "GND" at 131.335,49.143 h2 r270; Top Overlay "TX" at 141.495,47.767 h2 r270; Top Overlay "RX" at 144.035,47.856 h2 r270; Top Overlay "INT" at 146.575,48.165 h2 r270; Top Overlay "SCL" at 138.955,48.75 h2 r270; Top Overlay "GND" at 131.335,63.57 h2 r270; Top Overlay "+3.3V" at 133.875,63.57 h2 r270; Top Overlay "MOSI" at 136.415,63.57 h2 r270; Top Overlay "SCK" at 141.495,63.57 h2 r270; Top Overlay "MISO" at 138.955,63.57 h2 r270; Top Overlay "CS" at 144.035,63.57 h2 r270; Top Overlay "RST" at 146.575,63.57 h2 r270; Top Overlay "SDA" at 136.415,48.983 h2 r270; Bottom Overlay "1" at 130.7,53.791 h7.62 r270; Bottom Overlay "RST" at 146.575,60.586 h2 r270; Bottom Overlay "CS" at 144.035,61.563 h2 r270; Bottom Overlay "MISO" at 138.955,59.731 h2 r270; Bottom Overlay "SCK" at 141.495,60.415 h2 r270; Bottom Overlay "MOSI" at 136.415,59.804 h2 r270; Bottom Overlay "+3.3V" at 133.875,59.506 h2 r270; Bottom Overlay "GND" at 131.335,60.268 h2 r270; Bottom Overlay "AN" at 149.115,61.529 h2 r270; Bottom Overlay "SDA" at 136.415,45.79 h2 r270; Bottom Overlay "SCL" at 138.955,45.79 h2 r270; Bottom Overlay "INT" at 146.575,45.79 h2 r270; Bottom Overlay "RX" at 144.035,45.79 h2 r270; Bottom Overlay "TX" at 141.495,45.79 h2 r270; Bottom Overlay "GND" at 131.335,45.79 h2 r270; Bottom Overlay "+5V" at 133.875,45.79 h2 r270; Bottom Overlay "PWM" at 149.115,45.79 h2 r270; Bottom Overlay "BUS" at 151.274,55.188 h3.43 r270; Bottom Overlay "mikro" at 154.068,55.188 h2.7 r270
A4: Top Overlay "4" at 130.7,25.823 h7.62 r270; Top Overlay "BUS" at 151.236,24.248 h3.2 r270; Top Overlay "mikro" at 153.574,24.248 h2.7 r270; Top Overlay "PWM" at 149.115,19.428 h2 r270; Top Overlay "AN" at 149.115,33.57 h2 r270; Top Overlay "+5V" at 133.875,18.559 h2 r270; Top Overlay "GND" at 131.335,19.143 h2 r270; Top Overlay "TX" at 141.495,17.767 h2 r270; Top Overlay "RX" at 144.035,17.856 h2 r270; Top Overlay "INT" at 146.575,18.165 h2 r270; Top Overlay "SCL" at 138.955,18.75 h2 r270; Top Overlay "GND" at 131.335,33.57 h2 r270; Top Overlay "+3.3V" at 133.875,33.57 h2 r270; Top Overlay "MOSI" at 136.415,33.57 h2 r270; Top Overlay "SCK" at 141.495,33.57 h2 r270; Top Overlay "MISO" at 138.955,33.57 h2 r270; Top Overlay "CS" at 144.035,33.57 h2 r270; Top Overlay "RST" at 146.575,33.57 h2 r270; Top Overlay "SDA" at 136.415,18.983 h2 r270; Bottom Overlay "1" at 130.7,23.791 h7.62 r270; Bottom Overlay "RST" at 146.575,30.586 h2 r270; Bottom Overlay "CS" at 144.035,31.563 h2 r270; Bottom Overlay "MISO" at 138.955,29.731 h2 r270; Bottom Overlay "SCK" at 141.495,30.415 h2 r270; Bottom Overlay "MOSI" at 136.415,29.804 h2 r270; Bottom Overlay "+3.3V" at 133.875,29.506 h2 r270; Bottom Overlay "GND" at 131.335,30.268 h2 r270; Bottom Overlay "AN" at 149.115,31.529 h2 r270; Bottom Overlay "SDA" at 136.415,15.79 h2 r270; Bottom Overlay "SCL" at 138.955,15.79 h2 r270; Bottom Overlay "INT" at 146.575,15.79 h2 r270; Bottom Overlay "RX" at 144.035,15.79 h2 r270; Bottom Overlay "TX" at 141.495,15.79 h2 r270; Bottom Overlay "GND" at 131.335,15.79 h2 r270; Bottom Overlay "+5V" at 133.875,15.79 h2 r270; Bottom Overlay "PWM" at 149.115,15.79 h2 r270; Bottom Overlay "BUS" at 151.274,25.188 h3.43 r270; Bottom Overlay "mikro" at 154.068,25.188 h2.7 r270